# EAGLE board main_design2 (EAGLE 9.6.2)
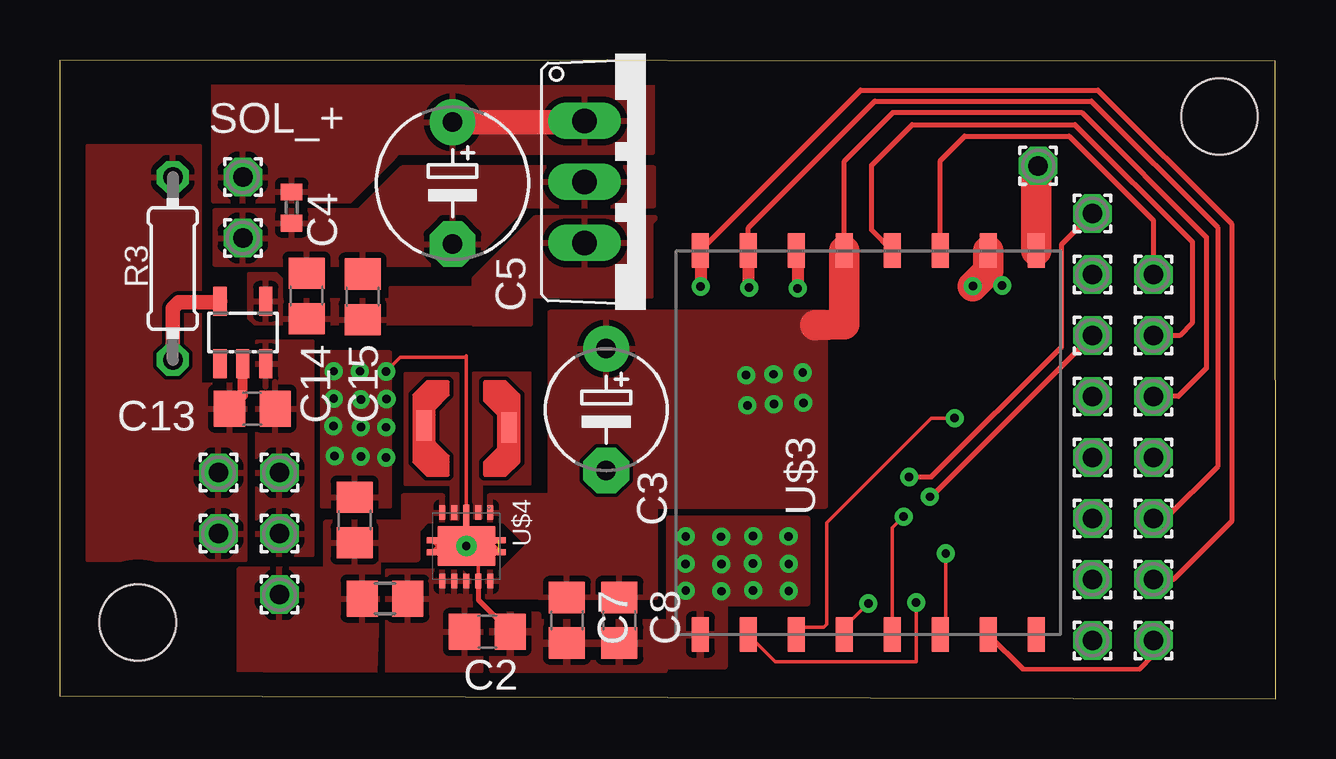
[diagram p0: board, top side]
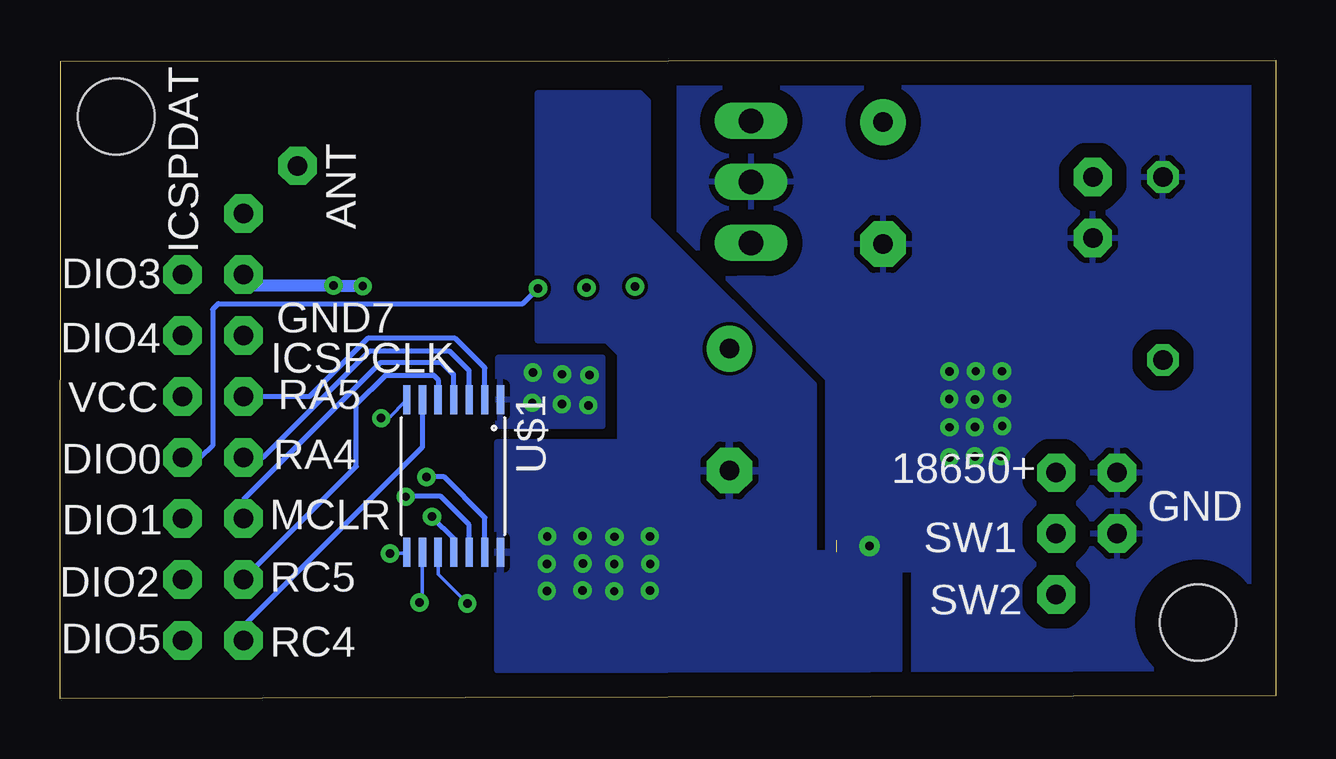
[diagram p1: board, bottom side, seen from below]

Size 50.65 x 26.61 mm. Coordinates in mm from the lower left corner, seen from the top.
Outline: 0,0.11 50.65,0 50.63,26.56 0,26.61 0,0.11
Copper layers (1*16): Top 0.035mm / dielectric 1.5mm / Bottom 0.035mm
Design rules "default *": minimum track width 6mil, minimum drill 0.35mm, track to track 6mil, track to pad 6mil, pad to pad 6mil, via to via 6mil, smd to smd 6mil, copper to edge 40mil, drill to drill 6mil, minimum pad ring 10mil, minimum via ring 8mil, stop-mask expansion 4mil, vias tented up to drill 0.36mm, thermal gap 10mil
Holes 3.17 mm at 3.24,3.17 48.31,24.26

## Footprints (pad centres in the part's own frame; a part is rotated, then mirrored left to right if it is on the bottom)
1,6/0,8 = drill 0.813 pad 1.6 octagon: 1 0,0
C0805 = smd 1.3 x 1.5: 1 -0.95,0; 2 0.95,0
E5-5 = drill 0.813 pad 1.905: + -2.54,0 | drill 0.813 pad 1.905 octagon: - 2.54,0
C0402 = smd 0.7 x 0.9: 1 -0.65,0; 2 0.65,0
E5-6 = drill 0.813 pad 1.905: + -2.54,0 | drill 0.813 pad 1.905 octagon: - 2.54,0
TO220V = drill 1.016 long: 1 -2.54,-2.54; 2 0,-2.54; 3 2.54,-2.54
SOT23-5L = smd 0.55 x 1.2: 1 -0.95,-1.3; 2 0,-1.3; 3 0.95,-1.3; 4 0.95,1.3; 5 -0.95,1.3
LPS4012-222MRC = smd 0.635 x 1.27: P$1 -1.765,0.127; P$2 1.778,0.051
R0805 = smd 1.3 x 1.5: 1 -0.95,0; 2 0.95,0
0204/7 = drill 0.813 octagon: 1 -3.81,0; 2 3.81,0
PIC16F(L)1615-TSSOP = smd 1.2 x 0.3: 1 -3.175,1.975; 2 -3.175,1.325; 3 -3.175,0.675; 4 -3.175,0.025; 5 -3.175,-0.625; 6 -3.175,-1.275; 7 -3.175,-1.925; 8 3.175,-1.925; 9 3.175,-1.275; 10 3.175,-0.625; 11 3.175,0.025; 12 3.175,0.675; 13 3.175,1.325; 14 3.175,1.975
RFM69HCW = smd 1.422 x 0.711: 3.3V 8,1; ANT 8,-7; DIO0 8,3; DIO1 8,5; DIO2 8,7; DIO3 8,-3; DIO4 8,-1; DIO5 -8,-5; GND@1 -8,7; GND@2 -8,-7; GND@3 8,-5; MISO -8,5; MOSI -8,3; NSS -8,-1; RESET -8,-3; SCK -8,1
TPS63001-VSON = smd 0.6 x 0.24: 1 -1.4,1; 2 -1.4,0.5; 4 -1.4,-0.5; 5 -1.4,-1; 6 1.45,-1; 7 1.45,-0.5; 8 1.45,0; 9 1.45,0.5; 10 1.45,1 | smd 0.889 x 0.24: 3 -1.273,0 | smd 1.65 x 2.4: 11@0 0,0.006 | smd 0.24 x 0.6: 11@1 -0.25,1.35; 11@2 0.25,1.35; 11@3 -0.25,-1.35; 11@4 0.25,-1.35 | drill 0.35: 11@5 0,0

## Placement (x,y rotation side)
18650+  [1,6/0,8]  9.14,9.41 0 top
ANT  [1,6/0,8]  40.75,22.2 90 top
C1  10uf  [C0805]  12.28,7.44 270 top
C2  0.1uf  [C0805]  17.81,2.78 0 top
C3  100uF  [E5-5]  22.76,12.04 270 top
C4  [C0402]  9.65,20.46 270 top
C5  100uF  [E5-6]  16.36,21.48 270 top
C7  10uf  [C0805]  21.12,3.26 270 top
C8  10uf  [C0805]  23.3,3.26 270 top
C13  [C0805]  8.01,12.08 180 top
C14  10uf  [C0805]  10.27,16.78 90 top
C15  0.1uf  [C0805]  12.61,16.74 90 top
DIO0  [1,6/0,8]  45.55,10.05 0 top
DIO1  [1,6/0,8]  45.55,7.51 0 top
DIO2  [1,6/0,8]  45.55,4.97 0 top
DIO3  [1,6/0,8]  45.55,17.67 0 top
DIO4  [1,6/0,8]  45.55,15.13 0 top
DIO5  [1,6/0,8]  45.55,2.43 0 top
GND  [1,6/0,8]  6.6,9.41 0 top
GND7  [1,6/0,8]  43.01,17.67 0 top
GND9  [1,6/0,8]  6.6,6.87 0 top
IC1  7805TV  [TO220V]  24.4,21.53 270 top
IC2  MCP73831  [SOT23-5L]  7.62,15.25 0 top
ICSPCLK  [1,6/0,8]  43.01,15.13 0 top
ICSPDAT  [1,6/0,8]  43.01,20.21 0 top
L1  LPS4012-SMD  [LPS4012-222MRC]  16.93,11.25 0 top
MCLR  [1,6/0,8]  43.01,7.51 0 top
R1  100R  [R0805]  13.54,4.17 180 top
R3  2kR  [0204/7]  4.7,17.92 270 top
RA4  [1,6/0,8]  43.01,10.05 0 top
RA5  [1,6/0,8]  43.01,12.59 0 top
RC4  [1,6/0,8]  43.01,2.43 0 top
RC5  [1,6/0,8]  43.01,4.97 0 top
SOL_+  [1,6/0,8]  7.62,21.73 0 top
SOL_GND  [1,6/0,8]  7.62,19.19 0 top
SW1  [1,6/0,8]  9.14,6.87 0 top
SW2  [1,6/0,8]  9.14,4.33 0 top
U$1  PIC16F1615-TSSOP  [PIC16F(L)1615-TSSOP]  34.28,9.27 270 bottom
U$3  RFM69HCW  [RFM69HCW]  33.68,10.67 90 top
U$4  TPS63001-VSON  [TPS63001-VSON]  16.93,6.35 270 top
VCC  VCC  [1,6/0,8]  45.55,12.59 0 top

## Library data of the parts
18650+ ANT DIO0 DIO1-DIO5 GND GND7 GND9 ICSPCLK ICSPDAT MCLR RA4 RA5 RC4 RC5 SOL_+ SOL_GND SW1 SW2 VCC = wirepad
C1-C5 C7 C8 C13-C15 = rcl; SPICEPREFIX: C
IC1 = linear
IC2 = MCP73831-SOP
L1 = LPS4012
R1 R3 = rcl; SPICEPREFIX: R
U$1 = PIC16F(L)1615
U$3 = RFM69C
U$4 = TPS63001

## Nets
GND: C1.1 C2.2 C3.- C4.2 C5.- C7.2 C8.2 C13.2 C14.2 C15.2 GND7.1 GND9.1 GND.1 IC1.2 IC2.2 R3.1 SOL_GND.1 U$1.14 U$3.GND@1 U$3.GND@2 U$3.GND@3 U$4.3 U$4.9 U$4.11@0 U$4.11@1 U$4.11@2 U$4.11@3 U$4.11@4 U$4.11@5
MOSI: U$1.7 U$3.MOSI
N$1: U$1.9 U$3.MISO
N$2: C2.1 R1.1 U$4.6 U$4.7 U$4.8
N$3: RA4.1 U$1.3
N$4: U$1.8 U$3.RESET
N$6: RA5.1 U$1.2
N$7: RC5.1 U$1.5
N$8: RC4.1 U$1.6
N$9: DIO2.1 U$3.DIO2
N$10: IC2.5 R3.2
N$12: ICSPCLK.1 U$1.12
N$13: ICSPDAT.1 U$1.13
N$14: MCLR.1 U$1.4
N$15: DIO1.1 U$3.DIO1
N$16: DIO0.1 U$3.DIO0
N$17: DIO4.1 U$3.DIO4
N$18: DIO3.1 U$3.DIO3
N$19: ANT.1 U$3.ANT
N$20: DIO5.1 U$3.DIO5
N$21: L1.P$1 U$4.4
N$22: L1.P$2 U$4.2
PRE-BATIN: 18650+.1 C13.1 IC2.3 SW1.1
SCK: U$1.10 U$3.SCK
SOL_IN: C4.1 C5.+ IC1.1 SOL_+.1
SS: U$1.11 U$3.NSS
VBAT-IN: C1.2 R1.2 SW2.1 U$4.5
VIN-5V: C14.1 C15.1 IC1.3 IC2.4
VOUT: C3.+ C7.1 C8.1 U$1.1 U$3.3.3V U$4.1 U$4.10 VCC.1

## Tracks (layer width: path | path; a pad name or v marks a point on that pad's centre or on a via)
GND  (via drill 0.35)  (1 unrouted)
  Top 0.152: v13.59,13.63 14.19,14.22 16.87,14.22 16.93,14.29 U$4.3 | U$4.11@5 17.43,5.86 17.43,4.62
  Top 0.203: U$4.9 17.43,4.62 17.43,4.11 C2.2
  Top 0.254: U$4.11@2 18.03,6.35 U$4.11@5 | U$4.11@5 16.68,6.1 U$4.11@4 15.83,6.35 | U$4.11@5 16.42,6.35 15.83,6.35 | 15.83,6.35 U$4.11@3 | U$4.11@5 U$4.3
  Top 0.406: C13.2 7.62,12.63 IC2.2
  Top 1.27: U$3.GND@3 38.68,17.83 v38.04,17.18
  Bottom 0.508: v38.04,17.18 39.23,17.18 v39.26,17.21 42.56,17.21 GND7.1
  other vias: 27.56,4.47 26.07,4.5 27.56,5.6 26.06,5.61 27.55,6.74 26.07,6.76 30.37,4.48 28.88,4.51 30.37,5.61 28.87,5.63 30.35,6.76 28.88,6.77 11.44,10.11 12.53,10.08 13.59,10.05 13.59,11.3 12.53,11.32 11.39,11.35 11.4,12.5 12.53,12.46 13.6,12.48 12.5,13.64 11.4,13.64
  pour Bottom (no thermals): 15.15,5.33 18.71,5.33 18.71,7.24 15.15,7.24
  pour Top: 5.84,13.09 7.73,13.09 7.73,5.77 1.14,5.77 1.14,23.03 5.84,23.03
  pour Bottom (isolate 0.61): 0.61,25.96 24.85,25.96 24.85,19.53 18.66,13.33 18.66,6.32 15.09,6.32 15.09,0.76 0.97,0.76 0.61,1.12
  pour Bottom: 19.27,6.04 15.71,6.04 15.71,1.19 32.41,1.19 32.41,10.67 27.28,10.67 27.28,14.38 27.86,14.96 30.73,14.96 30.73,25.21 26.5,25.21 26.17,24.88 26.17,19.98 19.27,13.07
  pour Top: 31.11,7.47 31.11,3.99 27.67,3.99 27.67,1.36 25.4,1.36 25.4,7.49
  pour Top: 25.17,3.15 19.9,3.15 19.9,3.47 18.02,3.47 18.02,1.2 25.17,1.2
  pour Top: 13.74,14.4 10.96,14.4 10.92,14.36 10.92,8.03 13.74,8.03
  pour Top: 6.44,20.32 6.44,18.1 16.94,18.1 19.38,20.54 24.74,20.54 24.74,22.11 14.26,22.11 12.47,20.32
MOSI  (via drill 0.35)
  Top 0.152: U$3.MOSI 30.98,2.97 31.81,2.97 31.94,3.1 31.94,7.32 36.31,11.68 v37.27,11.68
  Bottom 0.152: v37.27,11.68 36.96,11.68 U$1.7
N$1  (via drill 0.35)
  Top 0.152: U$3.MISO 29.81,1.54 35.67,1.54 v35.67,4
  Bottom 0.152: v35.67,4 35.55,4.12 U$1.9
N$2
  pour Top: 16.71,5.35 13.61,5.35 13.61,1.07 17.5,1.07 17.58,1.14 17.58,3.14 17.13,3.58 17.13,4.93
N$3
  Bottom 0.2: U$1.3 33.6,13.66 34.4,14.47 37.77,14.47 42.19,10.05 RA4.1
N$4  (via drill 0.35)
  Top 0.152: U$3.RESET 36.91,2.89 v36.91,6.04
  Bottom 0.152: v36.91,6.04 36.25,6.04 U$1.8
N$6
  Bottom 0.2: U$1.2 32.95,13.78 34.19,15.01 37.83,15.01 40.26,12.59 RA5.1
N$7
  Bottom 0.2: RC5.1 38.3,9.68 38.3,12.26 37.08,13.47 35.09,13.47 34.9,13.29 U$1.5
N$8
  Bottom 0.2: U$1.6 35.55,10.47 42.91,3.11 42.91,2.53 RC4.1
N$9  (via drill 0.35)
  Top 0.2: U$3.DIO2 33.36,25.35 43.24,25.35 48.82,19.77 48.82,7.38 46.41,4.97 DIO2.1
  Top 0.508: U$3.DIO2 26.7,18.65 v26.7,17.17
N$10
  Top 0.61: IC2.5 6.64,16.52 4.95,16.52 4.7,16.27 R3.2
N$12  (via drill 0.35)
  Top 0.2: v36.25,8.41 36.3,8.41 ICSPCLK.1
  Bottom 0.2: U$1.12 33.6,7.24 34.79,8.42 36.23,8.42 v36.25,8.41
N$13  (via drill 0.35)
  Top 0.2: v35.38,9.23 36.31,9.23 41.73,14.66 41.73,18.92 ICSPDAT.1
  Bottom 0.2: U$1.13 32.95,7.54 34.65,9.23 v35.38,9.23
N$14
  Bottom 0.2: U$1.4 34.25,13.5 34.75,14 37.3,14 43.02,8.28 MCLR.1
N$15  (via drill 0.35)
  Top 0.2: U$3.DIO1 28.68,19.62 33.95,24.89 42.98,24.89 48.23,19.63 48.23,9.66 46.08,7.51 DIO1.1
  Top 0.508: U$3.DIO1 28.68,17.15 v28.71,17.12
N$16  (via drill 0.35)
  Top 0.508: U$3.DIO0 30.73,18.61 v30.73,17.09
  Bottom 0.2: v30.73,17.09 31.37,16.46 44.06,16.46 44.3,16.22 44.3,10.54 44.79,10.05 DIO0.1
N$17
  Top 0.2: U$3.DIO4 33.82,19.53 33.82,22.22 35.51,23.91 42.29,23.91 47.18,19.02 47.18,15.66 46.65,15.13 DIO4.1
N$18
  Top 0.2: U$3.DIO3 36.68,22.42 37.69,23.43 42.05,23.43 45.55,19.93 DIO3.1
N$19
  Top 1.27: U$3.ANT 40.68,22.13 ANT.1
N$20
  Top 0.2: U$3.DIO5 40.11,1.24 44.98,1.23 45.55,1.8 DIO5.1
N$21
  pour Top (no thermals): 16.57,7.48 16.29,7.48 16.29,8.93 14.39,8.93 14.39,13.54 16.57,13.54
N$22
  pour Top (no thermals): 17.22,7.49 17.22,13.59 19.6,13.59 19.6,8.92 17.56,8.92 17.56,7.49
PRE-BATIN
  pour Top: 8.19,14.89 8.19,5.97 10.53,5.97 10.53,14.89
SCK  (via drill 0.35)
  Top 0.152: U$3.SCK 32.68,2.96 v33.68,3.96
  Bottom 0.152: v33.68,3.96 34.9,5.18 U$1.10
SOL_IN
  Top 1.016: IC1.1 21.81,24.02 C5.+
  pour Top: 6.39,20.74 12.08,20.74 13.88,22.54 14.1,22.76 24.69,22.76 24.69,25.76 24.65,25.79 24.54,25.68 6.52,25.68 6.39,25.55
SS  (via drill 0.35)
  Top 0.152: U$3.NSS 34.68,7.11 v35.15,7.58
  Bottom 0.2: v35.15,7.58 34.25,6.68 U$1.11
VBAT-IN
  pour Top: 11.06,5.38 7.45,5.38 7.45,1.17 7.51,1.12 13.12,1.12 13.14,1.09 13.27,5.13 13.27,5.79 14.87,5.79 14.92,5.84 14.92,7.02 15.3,7.4 15.95,7.4 15.95,8.45 14.3,8.45 14.3,7.34 11.06,7.34
VIN-5V
  pour Top: 13.75,17.12 18.4,17.12 18.4,15.61 8.12,15.61 7.87,15.85 7.87,17.69 9.02,17.69 9.22,17.49 9.22,16.69 9.28,16.62 13.75,16.62
  pour Top: 24.82,20.03 19.8,20.03 17.23,17.46 17.23,15.61 19.61,15.61 19.61,16.78 24.64,16.78 24.64,19.85
VOUT  (via drill 0.35)
  Top 0.2: U$3.3.3V 32.68,22.39 34.71,24.42 42.57,24.42 47.77,19.23 47.77,13.75 46.6,12.59 VCC.1
  Top 1.27: U$3.3.3V 32.68,15.6 31.46,15.56
  other vias: 29.73,13.51 28.59,13.47 28.64,12.22 29.74,12.27 30.98,12.32 30.95,13.59
  pour Top: 18.41,5.27 17.79,5.27 17.75,5.23 17.75,4.25 19.96,4.25 19.98,4.24 24.8,4.24 24.8,8.04 31.89,8.04 31.89,16.07 20.42,16.07 20.42,7.28
  pour Bottom: 32.38,14.21 28.05,14.21 28.05,11.35 32.38,11.35
  pour Top: 17.88,8.45 17.88,7.4 18.5,7.4 19.65,6.26 21.35,6.26 21.35,8.08 21.72,8.45